# EAGLE board untitled (EAGLE 9.6.2)
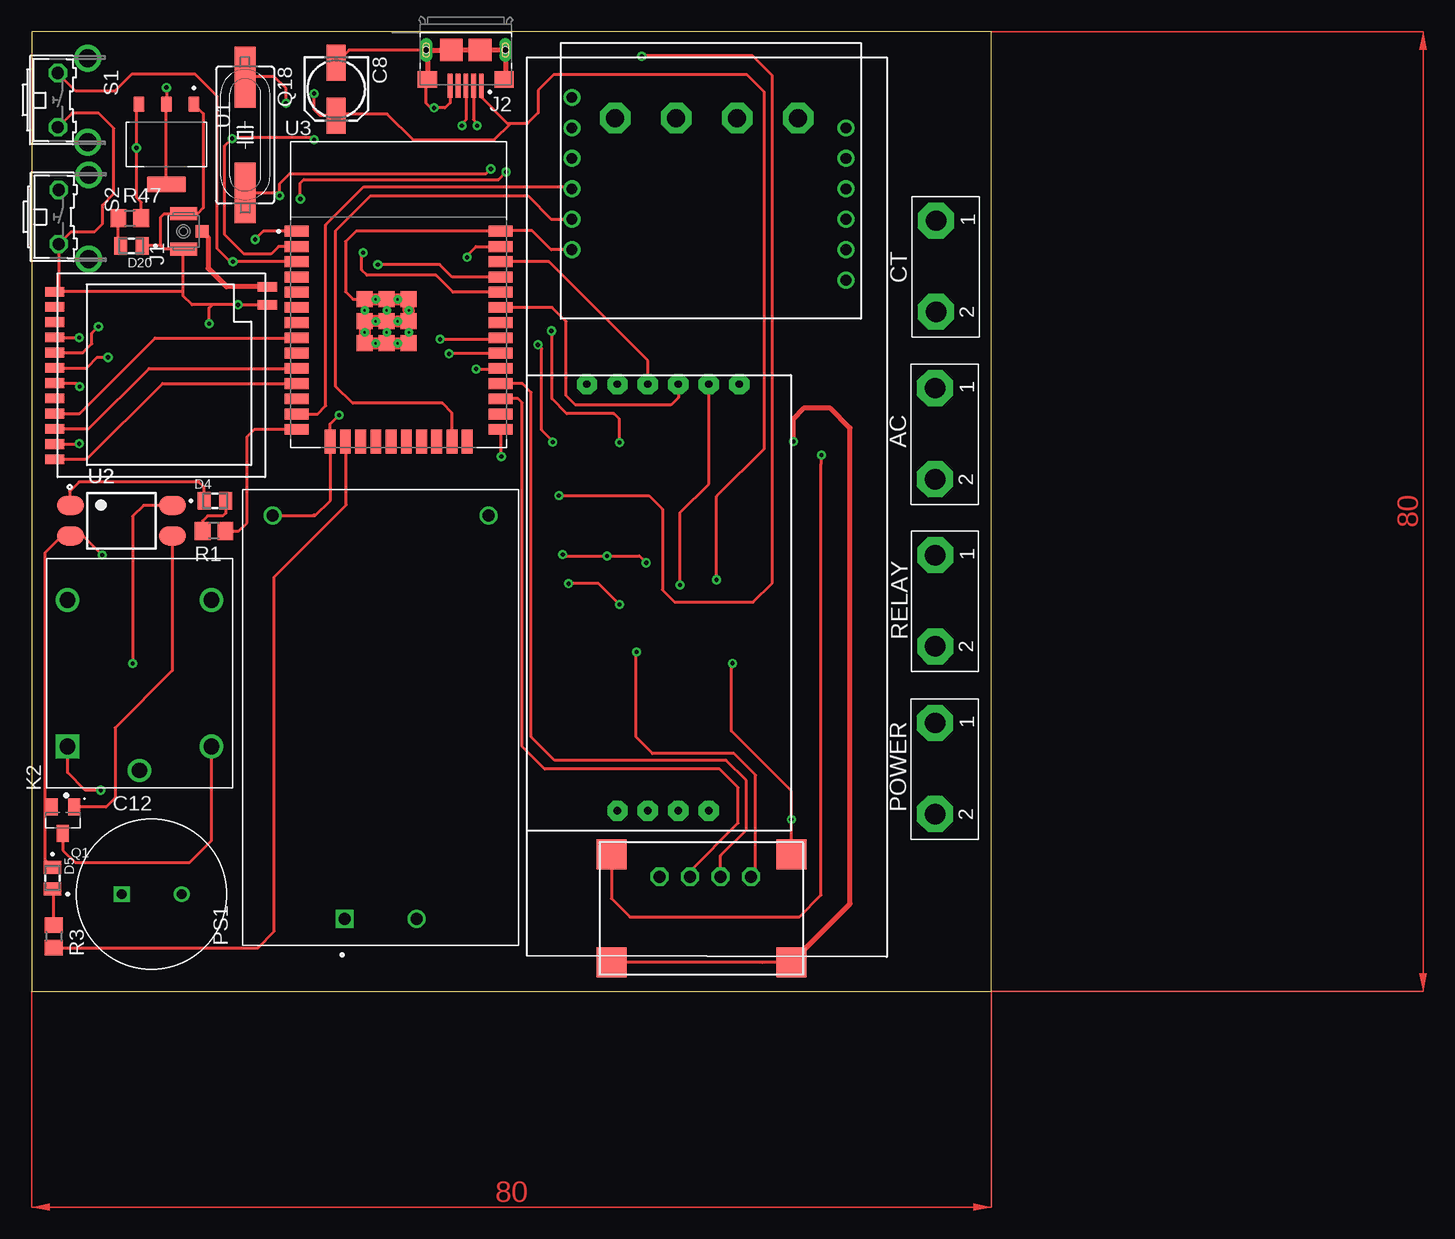
[diagram p0: board, top side]
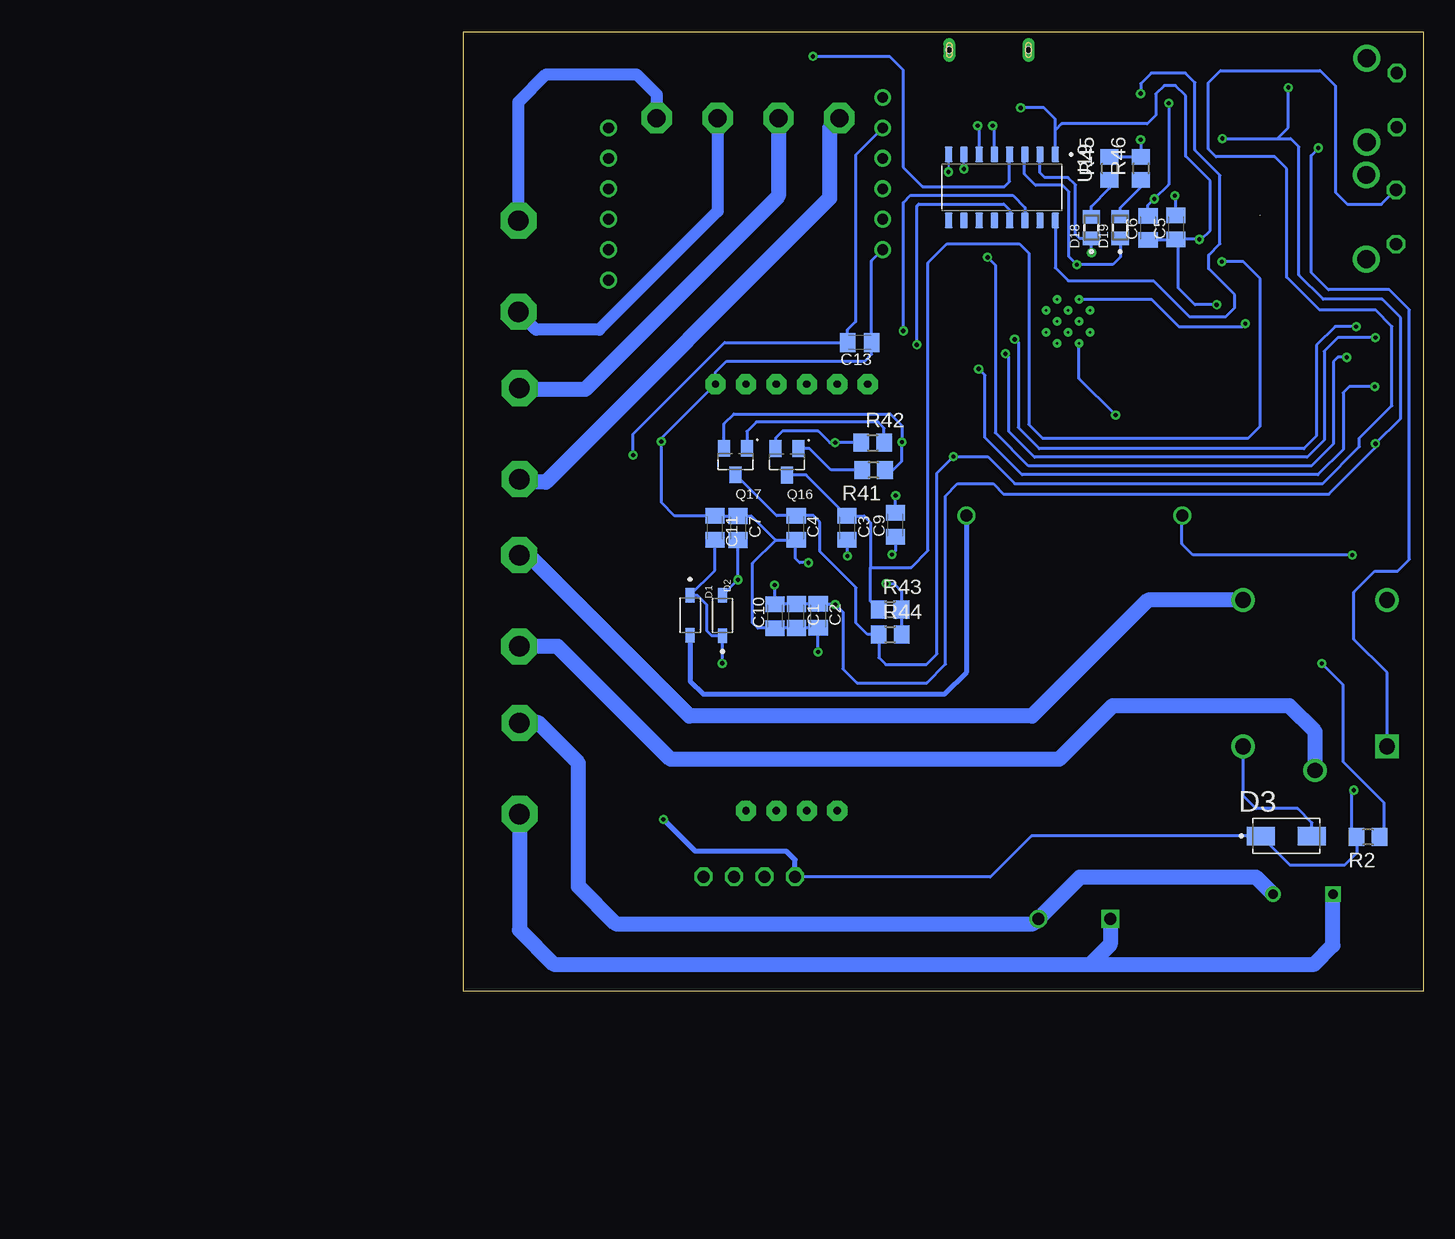
[diagram p1: board, bottom side, seen from below]

Size 80 x 80 mm. Coordinates in mm from the lower left corner, seen from the top.
Outline: 0,80 0,0 80,0 80,80 0,80
Copper layers (1*16): Top 0.035mm / dielectric 1.5mm / Bottom 0.035mm
Design rules "default": minimum track width 6mil, minimum drill 0.35mm, track to track 6mil, track to pad 6mil, pad to pad 6mil, via to via 6mil, smd to smd 6mil, copper to edge 40mil, drill to drill 6mil, minimum pad ring 10mil, minimum via ring 8mil, stop-mask expansion 4mil, vias tented up to drill 0mil, thermal gap 10mil

## Footprints (pad centres in the part's own frame; a part is rotated, then mirrored left to right if it is on the bottom)
C0805K = smd 1.3 x 1.6: 1 -1,0; 2 1,0
153CLV-0505 = smd 3 x 1.6: + 2.2,0; - -2.2,0
CAPPRD500W60D1250H2200 = drill 0.8 pad 1.15: N 2.5,0 | drill 0.8 pad 1.15 square: P -2.5,0
SOD3715X145N = smd 1.21 x 0.73: A 1.68,0; C -1.68,0
DIOM5226X240N = smd 2.33 x 1.55: A 2.135,0; C -2.135,0
LEDC2012X120N = smd 1.1 x 1.45: A 0.9,0; C -0.9,0
HRS_U.FL-R-SMT(01) = smd 1.1 x 2.25: 1 -1.475,0; 2 1.475,0 | smd 1.05 x 1.1: 3 0,-1.55
FCI_10118193-0001LF = smd 0.4 x 2: 1 -1.3,2.975; 2 -0.65,2.975; 3 0,2.975; 4 0.65,2.975; 5 1.3,2.975 | smd 1.6 x 1.4: S1 -3.2,2.45; S2 3.2,2.45 | smd 1.9 x 1.9: S3 1.2,0; S4 -1.2,0 | drill 0.5 pad 0.9 long: S5 -3.3,0; S6 3.3,0 | hole 0.5: -3.3,0; 3.3,0
RELAY_SRD-05VDC-SL-C = drill 1.32 square: A1 -6.1,6 | drill 1.32: A2 -6.1,-6; NC 6.1,6; NO 6.1,-6 | drill 1.29: COM -8.1,0
LORA-NICERF-V2 = smd 1.6 x 0.8: ANT 9.17,6.81; DIO0 -8.57,-5.03; DIO1 -8.57,-3.76; DIO2 -8.57,-2.49; GND -8.57,6.4; GND1 9.17,5.31; MISO -8.57,1.32; MOSI -8.57,0.05; NC -8.57,5.13; NC1 -8.57,3.86; NRST -8.57,-7.57; NSS -8.57,-1.22; SCK -8.57,2.59; VCC -8.57,-6.3
MINI360 = smd 2.5 x 2.5: IN+ 1,1; IN- 1,10; OUT+ 16,1; OUT- 16,10
CONV_HLK-5M05 = drill 1 pad 1.5 square: 1 -16.8,3 | drill 1 pad 1.5: 2 -16.8,-3; 3 16.8,9; 4 16.8,-9
PZEM004T = drill 1 octagon: 5V 3.7,-10.06; GND 3.7,-17.68; RX 3.7,-12.6; TX 3.7,-15.14 | drill 1.5 pad 2.54 octagon: CT1+ 66.94,-6.36; CT1- 66.94,-11.44; L1 66.94,-16.52; N1 66.94,-21.6
SOT95P240X120-3N = smd 1 x 1.4: 1 -0.95,-1.1; 2 0.95,-1.1; 3 0,1.1
SM49 = smd 5.08 x 1.778: 1 -4.826,0; 2 4.826,0
R0805 = smd 1.3 x 1.5: 1 -0.95,0; 2 0.95,0
RTC3231 = drill 0.6 pad 1.676 octagon: 32K -15.24,0; GND -15.24,12.7; GND1 20.32,10.16; SCL -15.24,5.08; SCL1 20.32,2.54; SDA -15.24,7.62; SDA1 20.32,5.08; SQW -15.24,2.54; VCC -15.24,10.16; VCC1 20.32,7.62
B3F-31XX = drill 1.016 octagon: 1 -2.261,-1.245; 2 2.261,-1.245 | drill 1.499 pad 2.159: 3 -3.505,1.245; 4 3.505,1.245
SIM800L = drill 0.9: DTR 17.78,-7.62; GND -5.08,-15.24; MIC+ 17.78,-10.16; MIC- 17.78,-12.7; NET -5.08,-2.54; RING 17.78,-5.08; RST -5.08,-7.62; RXD -5.08,-10.16; SPK+ 17.78,-15.24; SPK- 17.78,-17.78; TXD -5.08,-12.7; VCC -5.08,-5.08
TB7.62 = drill 1.7 pad 3 octagon: T1 -3.7,-0.6; T2 3.9,-0.6
SOT229P700X180-4N = smd 1.31 x 0.93: 1 -3.345,2.29; 2 -3.345,0; 3 -3.345,-2.29 | smd 1.31 x 3.24: 4 3.345,0
SOT254P975X400-4N = smd 2.25 x 1.6: 1 -4.25,1.27; 2 -4.25,-1.27; 3 4.25,-1.27; 4 4.25,1.27
MODULE_ESP32-WROOM-32D = smd 2 x 0.9: 1 -8.5,5.26; 2 -8.5,3.99; 3 -8.5,2.72; 4 -8.5,1.45; 5 -8.5,0.18; 6 -8.5,-1.09; 7 -8.5,-2.36; 8 -8.5,-3.63; 9 -8.5,-4.9; 10 -8.5,-6.17; 11 -8.5,-7.44; 12 -8.5,-8.71; 13 -8.5,-9.98; 14 -8.5,-11.25; 25 8.5,-11.25; 26 8.5,-9.98; 27 8.5,-8.71; 28 8.5,-7.44; 29 8.5,-6.17; 30 8.5,-4.9; 31 8.5,-3.63; 32 8.5,-2.36; 33 8.5,-1.09; 34 8.5,0.18; 35 8.5,1.45; 36 8.5,2.72; 37 8.5,3.99; 38 8.5,5.26 | smd 0.9 x 2: 15 -5.715,-12.25; 16 -4.445,-12.25; 17 -3.175,-12.25; 18 -1.905,-12.25; 19 -0.635,-12.25; 20 0.635,-12.25; 21 1.905,-12.25; 22 3.175,-12.25; 23 4.445,-12.25; 24 5.715,-12.25 | smd 1.33 x 1.33: 39_1 -2.835,-0.405; 39_2 -1,-0.405; 39_3 0.835,-0.405; 39_4 -2.835,-2.24; 39_5 -1,-2.24; 39_6 0.835,-2.24; 39_7 -2.835,-4.075; 39_8 -1,-4.075; 39_9 0.835,-4.075 | drill 0.2 pad 0.3: 39_10 -1.917,-0.405; 39_11 -0.083,-0.405; 39_12 -2.835,-1.323; 39_13 -1,-1.323; 39_14 0.835,-1.323; 39_15 -1.917,-2.24; 39_16 -0.083,-2.24; 39_17 -2.835,-3.158; 39_18 -1,-3.158; 39_19 0.835,-3.158; 39_20 -1.917,-4.075; 39_21 -0.083,-4.075
SOIC127P600X180-16N = smd 1.31 x 0.62: 1 -2.75,4.445; 2 -2.75,3.175; 3 -2.75,1.905; 4 -2.75,0.635; 5 -2.75,-0.635; 6 -2.75,-1.905; 7 -2.75,-3.175; 8 -2.75,-4.445; 9 2.75,-4.445; 10 2.75,-3.175; 11 2.75,-1.905; 12 2.75,-0.635; 13 2.75,0.635; 14 2.75,1.905; 15 2.75,3.175; 16 2.75,4.445

## Placement (x,y rotation side)
C1  10uF  [C0805K]  52.24,31.28 270 bottom
C2  100nF  [C0805K]  50.42,31.29 270 bottom
C3  100nF  [C0805K]  48.02,38.62 270 bottom
C4  100nF  [C0805K]  52.26,38.63 270 bottom
C5  22pF  [C0805K]  20.6,63.66 90 bottom
C6  22pF  [C0805K]  22.92,63.63 90 bottom
C7  1uF  [C0805K]  57.1,38.61 270 bottom
C8  10uF  [153CLV-0505]  25.4,75.2 270 top
C9  100nF  [C0805K]  43.99,38.87 90 bottom
C10  10uF  [C0805K]  54.03,31.26 90 bottom
C11  10uF  [C0805K]  59.03,38.63 270 bottom
C12  UPM2E100MHD1TO  [CAPPRD500W60D1250H2200]  10.01,8.1 0 top
C13  10uF  [C0805K]  46.96,54.08 180 bottom
D1  1N5819HW-7  [SOD3715X145N]  61.1,31.34 270 bottom
D2  1N5819HW-7  [SOD3715X145N]  58.4,31.32 90 bottom
D3  US1M-13  [DIOM5226X240N]  11.4,12.94 0 bottom
D4  SML-LXT0805IW-TR  [LEDC2012X120N]  15.29,40.88 0 top
D5  SML-LXT0805IW-TR  [LEDC2012X120N]  1.75,9.42 270 top
D18  SML-LXT0805IW-TR  [LEDC2012X120N]  27.65,63.65 90 bottom
D19  SML-LXT0805IW-TR  [LEDC2012X120N]  25.25,63.66 90 bottom
D20  SML-LXT0805IW-TR  [LEDC2012X120N]  8.33,62.13 180 top
J1  U.FL-R-SMT(01)  [HRS_U.FL-R-SMT(01)]  12.68,63.34 90 top
J2  10118193-0001LF  [FCI_10118193-0001LF]  36.2,78.46 180 top
K2  SRD-05VDC-SL-C  [RELAY_SRD-05VDC-SL-C]  9,26.5 90 top
LORA-NICERF-V1  [LORA-NICERF-V2]  10.49,51.91 0 top
MINI1  [MINI360]  64.33,12.39 180 top
PS1  HLK-5M05  [CONV_HLK-5M05]  29.08,22.83 90 top
PZEM004T1  [PZEM004T]  42.29,5.84 90 top
Q1  S9013  [SOT95P240X120-3N]  2.62,14.25 180 top
Q16  MMBT3904  [SOT95P240X120-3N]  53.03,44.13 180 bottom
Q17  MMBT3904  [SOT95P240X120-3N]  57.31,44.15 180 bottom
Q18  12MHz  [SM49]  17.8,71.37 270 top
R1  330  [R0805]  15.21,38.37 180 top
R2  10k  [R0805]  4.59,12.85 180 bottom
R3  10k  [R0805]  1.85,4.57 270 top
R41  10k  [R0805]  45.81,43.45 180 bottom
R42  10k  [R0805]  45.87,45.72 0 bottom
R43  10k  [R0805]  44.43,31.81 0 bottom
R44  10k  [R0805]  44.43,29.74 0 bottom
R45  10k  [R0805]  26.13,68.58 90 bottom
R46  10k  [R0805]  23.51,68.59 90 bottom
R47  10k  [R0805]  8.19,64.44 0 top
RTC1  [RTC3231]  46.29,35.36 270 top
S1  [B3F-31XX]  3.44,74.28 270 top
S2  [B3F-31XX]  3.51,64.54 270 top
SIM800L1  [SIM800L]  50.12,77.05 0 top
TB7.1  [TB7.62]  75.92,18.66 270 top
TB7.2  [TB7.62]  75.94,32.65 270 top
TB7.3  [TB7.62]  75.93,46.58 270 top
TB7.4  [TB7.62]  76.01,60.53 270 top
U1  AMS1117  [SOT229P700X180-4N]  11.24,70.6 270 top
U2  PC817X2NIP0F  [SOT254P975X400-4N]  7.49,39.22 0 top
U3  ESP32-WROOM-32D  [MODULE_ESP32-WROOM-32D]  30.6,58.09 0 top
U19  CH340G  [SOIC127P600X180-16N]  35.1,67.01 270 bottom

## Library data of the parts
C1-C11 C13 = rcl; SPICEPREFIX: C
C12 = UPM2E100MHD1TO; AVAILABILITY: In Stock; DESCRIPTION: 10 µF 250 V Aluminum Electrolytic Capacitors Radial, Can - 5000 Hrs @ 105°C; MF: Nichicon; MP: UPM2E100MHD1TO; PACKAGE: Radial Nichicon; PRICE: None; PURCHASE-URL: https://pricing.snapeda.com/search/part/UPM2E100MHD1TO/?ref=eda
D1 D2 = 1N5819HW-7; AVAILABILITY: In Stock; DESCRIPTION: Diode Schottky 40 V 1A Surface Mount SOD-123; MF: Diodes Inc.; MP: 1N5819HW-7; PACKAGE: SOD-123 Fairchild Semiconductor; PRICE: None; PURCHASE-URL: https://pricing.snapeda.com/search/part/1N5819HW-7/?ref=eda
D3 = US1M-13; AVAILABILITY: In Stock; DESCRIPTION: Diode Standard 1000 V 1A Surface Mount SMA; MF: Diodes Incorporated; MP: US1M-13; PACKAGE: DO-214AC-214 Diodes Incorporated; PRICE: None; PURCHASE-URL: https://pricing.snapeda.com/search/part/US1M-13/?ref=eda
D4 D5 D18-D20 = SML-LXT0805IW-TR; AVAILABILITY: In Stock; DESCRIPTION: Red - LED Indication - Discrete 2V 0805 (2012 Metric); MF: Lumex Opto/Components; MP: SML-LXT0805IW-TR; PACKAGE: 0805 Lumex; PRICE: None; PURCHASE-URL: https://pricing.snapeda.com/search/part/SML-LXT0805IW-TR/?ref=eda
J1 = U.FL-R-SMT_01_; AVAILABILITY: In Stock; DESCRIPTION: U.FL (UMCC) Connector Receptacle, Male Pin 50Ohm Surface Mount Solder. RF Connectors / Coaxial Connectors; MF: Hirose; MP: U.FL-R-SMT(01); PACKAGE: None; PRICE: None; PURCHASE-URL: https://pricing.snapeda.com/search/part/U.FL-R-SMT(01)/?ref=eda
J2 = 10118193-0001LF; AVAILABILITY: In Stock; DESCRIPTION: USB - micro B USB 2.0 Receptacle Connector 5 Position Surface Mount, Right Angle; Through Hole; MF: FCI; MP: 10118193-0001LF; PACKAGE: None; PRICE: None; PURCHASE-URL: https://pricing.snapeda.com/search/part/10118193-0001LF/?ref=eda
K2 = SRD-05VDC-SL-C; AVAILABILITY: Not in stock; DESCRIPTION: 5V Trigger Relay Module For Arduino And Raspberry Pi 5V Trigger Relay Module For Arduino And Raspberry Pi; MF: Songle Relay; MP: SRD-05VDC-SL-C; PACKAGE: NON STANDARD-5 Songle Relay; PRICE: None
LORA-NICERF-V1 = LORA-NICERF-V2
MINI1 = mini360
PS1 = HLK-5M05; AVAILABILITY: Not in stock; MF: Hi-link; MP: HLK-5M05; PACKAGE: Package; PRICE: None
PZEM004T1 = PZEM004T
Q1 = S9013; AVAILABILITY: In Stock; DESCRIPTION: Bipolar (BJT) Transistor NPN 20V 500mA 625mW Through Hole TO-92-3; MF: JCET; MP: S9013; PACKAGE: SOT-23-3 JCET; PRICE: None; PURCHASE-URL: https://pricing.snapeda.com/search/part/S9013/?ref=eda
Q16 Q17 = MMBT3904; AVAILABILITY: In Stock; DESCRIPTION: Bipolar (BJT) Transistor NPN 40 V 200 mA 300MHz 300 mW Surface Mount SOT-23-3 (TO-236); MF: ON Semiconductor; MP: MMBT3904; PACKAGE: SOT-23-3 Motorola; PRICE: None
Q18 = crystal; OC_FARNELL: unknown; OC_NEWARK: unknown
R1-R3 R41-R47 = rcl; SPICEPREFIX: R
RTC1 = rtc3231
S1 S2 = switch-omron; MPN: B3F-3100; OC_FARNELL: 959704; OC_NEWARK: 36M3582
SIM800L1 = sim800l
TB7.1-TB7.4 = TB7.62
U1 = AMS1117; AVAILABILITY: Not in stock; DESCRIPTION: 1A LOW DROPOUT VOLTAGE REGULATOR SOT-223; MF: Advanced Monolithic Systems; MP: AMS1117; PACKAGE: SOT-223 Seeed Technology; PRICE: None
U2 = PC817X2NIP0F; AVAILABILITY: Not in stock; DESCRIPTION: Optoisolator Transistor Output 5000Vrms 1 Channel 4-SMD; MF: Sharp Microelectronics; MP: PC817X2NIP0F; PACKAGE: SMD-4 Sharp Microelectronics; PRICE: None
U3 = ESP32-WROOM-32D; AVAILABILITY: In Stock; DESCRIPTION: Bluetooth, WiFi 802.11b/g/n, Bluetooth v4.2 +EDR, Class 1, 2 and 3 Transceiver Module 2.4GHz ~ 2.5GHz Integrated; MF: Espressif Systems; MP: ESP32-WROOM-32D; PACKAGE: Module Espressif Systems; PRICE: None; PURCHASE-URL: https://pricing.snapeda.com/search/part/ESP32-WROOM-32D/?ref=eda
U19 = CH340G; AVAILABILITY: Not in stock; DESCRIPTION: USB Interface Integrated Circuit; MF: WCH; MP: Ch340G; PACKAGE: None; PRICE: None

## Nets
3V3: C1.1 C2.1 C10.2 LORA-NICERF-V1.VCC R43.2 R44.2 R45.2 R46.2 RTC1.VCC U1.2 U1.4 U3.2
ANT: J1.3 LORA-NICERF-V1.ANT
DTR: Q17.2 R41.1 U19.13
EN: C3.1 Q16.3 R43.1 S1.1 U3.3
GND: C1.2 C2.2 C3.2 C4.2 C5.1 C6.1 C7.1 C8.- C9.1 C10.1 C11.1 C13.1 D5.C D20.C J1.1 J1.2 J2.5 J2.S1 J2.S2 J2.S3 J2.S4 J2.S5 J2.S6 LORA-NICERF-V1.GND LORA-NICERF-V1.GND1 MINI1.IN- MINI1.OUT- PS1.3 PZEM004T1.GND Q1.2 RTC1.GND S1.2 S2.2 SIM800L1.GND U1.1 U2.2 U3.1 U3.15 U3.38 U3.39_1 U3.39_2 U3.39_3 U3.39_4 U3.39_5 U3.39_6 U3.39_7 U3.39_8 U3.39_9 U3.39_10 U3.39_11 U3.39_12 U3.39_13 U3.39_14 U3.39_15 U3.39_16 U3.39_17 U3.39_18 U3.39_19 U3.39_20 U3.39_21 U19.1
IO0: C4.1 Q17.3 R44.1 S2.1 U3.25
LED-LORA: R3.2 U3.16
LORA_DI0: LORA-NICERF-V1.DIO0 U3.10
LORA_DI1: LORA-NICERF-V1.DIO1 U3.8
MISO_VSPI: LORA-NICERF-V1.MISO U3.31
MOSI_VSPI: LORA-NICERF-V1.MOSI U3.37
N$1: C12.P PS1.1 TB7.1.T2
N$2: C12.N PS1.2 TB7.1.T1
N$3: D1.A PS1.4
N$4: D4.C U2.1
N$5: R2.1 U2.4
N$6: Q1.1 U2.3
N$7: D3.A K2.A2 Q1.3
N$8: D4.A R1.2
N$9: K2.COM TB7.2.T2
N$10: K2.NO TB7.2.T1
N$11: Q17.1 R42.2
N$12: D5.A R3.1
N$13: C13.2 MINI1.OUT+ SIM800L1.VCC
N$15: PZEM004T1.CT1+ TB7.3.T2
N$16: PZEM004T1.CT1- TB7.3.T1
N$17: PZEM004T1.L1 TB7.4.T2
N$18: PZEM004T1.N1 TB7.4.T1
N$99: Q16.1 R41.2
N$102: C5.2 Q18.2 U19.7
N$103: C6.2 Q18.1 U19.8
N$104: C9.2 U19.4
N$105: D18.A R45.1
N$106: D19.A R46.1
N$107: D20.A R47.1
RELAY: R1.1 U3.14
RST_LORA: LORA-NICERF-V1.NRST U3.11
RTS: Q16.2 R42.1 U19.14
RX: D19.C U3.35 U19.3
RX_PZEM: PZEM004T1.RX U3.27
RX_SIM: SIM800L1.RXD U3.13
SCK_VSPI: LORA-NICERF-V1.SCK U3.30
SCL: RTC1.SCL U3.36
SDA: RTC1.SDA U3.33
SS_LORA: LORA-NICERF-V1.NSS U3.29
TX: D18.C U3.34 U19.2
TX_PZEM: PZEM004T1.TX U3.28
TX_SIM: SIM800L1.TXD U3.23
USB_N: J2.2 U19.6
USB_P: J2.3 U19.5
VCC: C11.2 D1.C D2.C D3.C K2.A1 MINI1.IN+ PZEM004T1.5V R2.2 R47.2 U1.3
VCC_USB: C7.2 C8.+ D2.A J2.1 U19.16

## Tracks (layer width: path | path; a pad name or v marks a point on that pad's centre or on a via)
3V3  (via drill 0.35)
  Top 0.254: U1.4 U1.2 v11.25,75.33 | U3.2 20.6,62.08 19.97,61.45 17.71,61.45 16.11,63.05 16.11,70.47 v16.73,71.08 16.83,71.18 23.34,71.18 v23.55,70.97 | v54.05,33.86 54.05,39.89 56.45,42.29 RTC1.VCC | v49.01,32.24 47.28,33.97 v44.75,33.97 | LORA-NICERF-V1.VCC 3.95,45.61 v3.97,45.63
  Bottom 0.254: R45.2 26.12,69.54 R46.2 23.55,69.58 v23.55,70.97 | R44.2 R43.2 43.48,33.33 44.12,33.97 v44.75,33.97 | v16.73,71.08 12.15,71.08 | v11.25,75.33 11.25,71.99 12.15,71.08 | v54.05,33.86 54.03,33.83 C10.2 54.01,32.28 C1.1 C2.1 49.05,32.29 v49.01,32.24 48.37,31.61 48.37,26.88 47.19,25.7 41.38,25.7 39.81,27.27 39.81,41.3 38.8,42.3 35.83,42.3 34.96,41.44 7.85,41.44 3.9,45.38 3.9,45.56 v3.97,45.63 1.87,47.73 1.87,56.13 3.42,57.68 8.32,57.68 10.34,59.69 10.34,70.38 11.04,71.08 12.15,71.08
ANT
  Top 0.406: J1.3 14.71,62.85 14.71,60.26 16.25,58.72 LORA-NICERF-V1.ANT
DTR  (via drill 0.35)
  Top 0.254: v43.45,45.79 43.45,45.87 42.53,46.78 42.53,53.56 v42.21,53.88
  Bottom 0.254: Q17.2 58.26,47.32 57.46,48.12 44.42,48.12 43.45,47.15 v43.45,45.79 43.45,44.19 44.18,43.45 R41.1 | v42.21,53.88 42.21,65.45 42.05,65.61 34.94,65.61 34.45,65.12 34.45,64.27 U19.13
EN  (via drill 0.35)
  Top 0.254: U3.3 v16.79,60.81 16.57,60.81 15.49,61.89 15.49,74.61 13.64,76.46 8.37,76.46 6.95,75.04 3.69,75.04 S1.1
  Bottom 0.254: Q16.3 51.43,43.03 C3.1 46.61,39.62 46.06,39.07 46.06,35.34 | 46.06,35.34 46.06,32.49 R43.1 | 46.06,35.34 42.66,35.34 41.26,36.74 41.26,60.73 39.67,62.32 33.66,62.32 32.87,61.53 32.87,47.25 31.74,46.11 14.56,46.11 13.57,47.1 13.57,59.4 14.99,60.82 16.79,60.82 v16.79,60.81
GND  (via drill 0.35)
  Top 0.254: J2.5 34.9,74.06 34.47,73.64 v33.55,73.64 33.28,73.64 32.88,74.04 32.88,75.89 J2.S2 | 60.92,2.39 MINI1.IN- MINI1.OUT- | J1.1 12.64,61.86 | 12.64,61.86 11.02,61.86 10.75,62.13 | 10.75,62.13 D20.C | 10.75,62.13 10.75,64.51 11.05,64.81 J1.2 13.83,64.81 14.32,65.3 14.32,73.16 U1.1 | J2.S6 26.45,78.46 C8.- | PS1.3 23.49,39.63 | 23.49,39.63 23.63,39.63 24.91,40.92 24.91,45.81 U3.15 24.89,47.28 v25.63,48.02 | SIM800L1.GND 43.31,61.81 41.71,63.42 39.17,63.42 U3.38 27.04,63.35 26.18,62.49 26.18,58.3 26.8,57.68 U3.39_1 | LORA-NICERF-V1.GND1 v17.21,57.22 15.08,57.22 | 15.08,57.22 13.37,57.22 12.64,57.96 12.64,58.31 | 12.64,58.31 12.64,61.86 | PZEM004T1.GND 60.36,9.93 60.36,18.02 58.56,19.82 51.77,19.82 50.4,21.18 50.4,28.26 v50.43,28.28 | v44.28,36.4 44.4,36.28 v47.98,36.28 50.68,36.28 v51.24,35.72 | 23.56,39.7 23.49,39.63 | Q1.2 1.14,15.88 | 1.14,15.88 1.14,36.58 2.52,37.95 U2.2 4.32,37.95 v5.9,36.37 | D5.C 1.14,10.93 1.14,15.88 | 12.64,58.31 2.11,58.31 | 2.11,58.31 LORA-NICERF-V1.GND | 2.11,58.31 2.26,58.47 S2.2 3.3,63.31 5.25,63.31 5.91,63.98 5.91,65.53 6.85,66.47 6.85,71.93 5.58,73.2 3.38,73.2 S1.2 | v14.81,55.66 14.81,56.95 15.08,57.22 | U3.1 19.32,63.35 v18.64,62.67
  Top 0.406: J2.S1 39.5,76.11 J2.S5 J2.S4 J2.S3 J2.S6 33,78.36 J2.S2 | 31.44,56.71 U3.39_6 U3.39_14 | U3.39_5 U3.39_13 U3.39_2 U3.39_10 | U3.39_5 U3.39_16 | U3.39_16 U3.39_5 | U3.39_19 U3.39_9 U3.39_21 | U3.39_18 U3.39_8 U3.39_20 | U3.39_17 U3.39_4 U3.39_15 | U3.39_12 U3.39_1 | U3.39_11 U3.39_3 | MINI1.IN- 68.23,7.29 68.23,46.95 66.59,48.59 64.37,48.59 63.48,47.7 63.48,45.83 v63.5,45.83
  Top 1.016: U3.39_1 U3.39_2 U3.39_3 31.44,56.71 | U3.39_16 U3.39_6 | U3.39_5 U3.39_4 U3.39_7 U3.39_8 U3.39_9
  Bottom 0.254: SIM800L1.GND 45.97,60.89 C13.1 45.97,53.1 46.54,52.52 58.06,52.52 58.99,51.59 RTC1.GND 63.5,46.09 v63.5,45.83 63.5,40.75 62.38,39.63 C11.1 59.02,39.61 C7.1 55.99,39.61 53.99,37.61 53.96,37.61 | 53.96,37.61 52.29,37.61 C4.2 52.33,37.56 52.33,36.08 51.97,35.72 v51.24,35.72 | 48.03,37.63 C3.2 47.98,37.58 v47.98,36.28 | 44.24,37.62 C9.1 43.99,36.69 v44.28,36.4 | C2.2 50.68,30.29 | 50.68,30.29 C1.2 54.01,30.28 C10.1 55.45,30.27 55.9,30.71 55.9,35.67 53.96,37.61 | 20.72,62.63 20.63,62.63 C5.1 20.44,62.66 20.44,58.64 19.02,57.22 v17.21,57.22 | 20.72,62.63 C6.1 | v50.43,28.28 50.43,30.03 50.68,30.29 | v5.9,36.37 19.18,36.37 20.09,37.28 20.09,39.62 PS1.3 | v25.63,48.02 28.68,51.08 U3.39_20 | U19.1 30.66,71.8 | 30.66,71.8 30.66,72.69 31.63,73.67 33.55,73.67 v33.55,73.64 | U3.39_10 22.64,57.68 20.37,55.41 15.06,55.41 v14.81,55.66 | 20.72,62.63 20.68,62.67 v18.64,62.67 18.48,62.67 17.75,63.41 17.75,67.56 19.78,69.59 19.78,74.64 20.64,75.5 21.59,75.5 22.28,74.81 22.28,73.02 23,72.3 30.15,72.3 30.66,71.8
IO0  (via drill 0.35)
  Top 0.254: v39.16,44.57 39.16,46.78 U3.25
  Bottom 0.254: Q17.3 53.9,39.63 C4.1 50.82,39.63 50.29,39.11 50.29,36.67 47.26,33.63 47.26,30.68 46.31,29.74 R44.1 45.38,27.81 44.8,27.23 41.41,27.23 40.52,28.12 40.52,43.21 v39.16,44.57 36.28,44.57 34.03,42.32 8.38,42.32 5.3,45.39 5.3,46.11 2.6,48.81 2.6,55.42 3.96,56.78 8.61,56.78 11.36,59.52 11.36,68.55 12.38,69.56 17.26,69.56 17.9,70.2 17.9,75.75 16.9,76.75 8.59,76.75 7.31,75.48 7.31,66.59 6.31,65.59 3.47,65.59 S2.1
LED-LORA
  Top 0.254: R3.2 18.87,3.62 20.24,4.99 20.24,34.54 26.24,40.54 26.24,45.75 U3.16
LORA_DI0
  Top 0.254: LORA-NICERF-V1.DIO0 4.76,46.88 9.8,51.92 U3.10
LORA_DI1
  Top 0.254: LORA-NICERF-V1.DIO1 4,48.15 10.31,54.46 U3.8
MISO_VSPI  (via drill 0.35)
  Top 0.254: LORA-NICERF-V1.MISO 4.27,53.23 5.02,53.98 5.02,54.84 v5.58,55.4 | v34.05,54.35 38.99,54.35 U3.31
  Bottom 0.254: v5.58,55.4 7.34,55.4 8.88,53.86 8.88,46.3 9.94,45.23 31.99,45.23 33.74,46.99 33.74,54.09 34,54.35 v34.05,54.35
MOSI_VSPI  (via drill 0.35)
  Top 0.254: LORA-NICERF-V1.MOSI 4.59,51.96 5.46,52.84 v6.37,52.84 | U3.37 37.05,62.08 36.3,61.33 v36.3,61.18
  Bottom 0.254: v6.37,52.84 7.11,52.84 7.47,52.47 7.47,45.62 9.31,43.78 32.89,43.78 35.67,46.57 35.67,60.55 v36.3,61.18
N$1
  Bottom 1.27: PS1.1 26.08,3.89 27.73,2.25 | 27.73,2.25 72.48,2.25 75.33,5.09 TB7.1.T2 | 27.73,2.25 9.07,2.25 7.51,3.8 C12.P
N$2
  Bottom 1.27: C12.N 13.92,9.5 28.62,9.5 PS1.2 32.5,5.62 67.31,5.62 70.41,8.71 70.41,19.02 73.77,22.38 75.3,22.38 TB7.1.T1
N$3
  Bottom 0.406: D1.A 61.1,25.86 60,24.76 39.9,24.76 38.05,26.61 38.05,39.6 PS1.4
N$4
  Top 0.254: D4.C 14.39,42.02 13.95,42.45 3.97,42.45 3.18,41.66 3.18,40.55 U2.1
N$5  (via drill 0.35)
  Top 0.254: U2.4 9.33,40.49 8.43,39.59 v8.43,27.31
  Bottom 0.254: v8.43,27.31 6.68,25.56 6.68,19.14 3.26,15.72 3.26,13.23 R2.1
N$6
  Top 0.254: U2.3 11.73,26.72 6.97,21.95 6.97,16.11 6.2,15.35 Q1.1
N$7
  Top 0.254: Q1.3 2.62,11.74 3.64,10.72 13.16,10.72 15,12.56 K2.A2
  Bottom 0.254: D3.A 9.26,14.03 10.45,15.22 13.93,15.22 15,16.29 K2.A2
N$8
  Top 0.254: D4.A 16.19,39.86 15.95,39.62 14.68,39.62 14.26,39.2 R1.2
N$9
  Bottom 1.27: K2.COM 9,21.63 11.15,23.78 25.89,23.78 30.34,19.33 62.72,19.33 72.15,28.75 TB7.2.T2
N$10
  Bottom 1.27: K2.NO 22.93,32.6 32.6,22.93 61.17,22.93 74.58,36.35 TB7.2.T1
N$11
  Bottom 0.254: R42.2 44.92,46.94 45.43,47.45 55.58,47.45 56.36,46.67 Q17.1
N$12
  Top 0.254: R3.1 1.85,8.43 D5.A
N$13  (via drill 0.35)
  Top 0.254: MINI1.OUT+ 48.33,7.73 49.88,6.19 64,6.19 65.82,8.01 65.82,43.96 65.85,43.98 v65.85,44.7
  Bottom 0.254: SIM800L1.VCC 47.3,69.71 47.3,55.81 47.97,55.14 C13.2 58.22,54.08 65.85,46.46 v65.85,44.7
N$15
  Bottom 1.27: PZEM004T1.CT1+ 49.46,71.97 49.46,66.09 73.12,42.44 75.09,42.44 TB7.3.T2
N$16
  Bottom 1.27: PZEM004T1.CT1- 53.73,66.29 69.86,50.16 75.21,50.16 TB7.3.T1
N$17
  Bottom 1.016: PZEM004T1.L1 58.81,65.02 68.69,55.15 73.92,55.15 TB7.4.T2
N$18
  Bottom 1.016: TB7.4.T1 75.41,74.12 73.1,76.43 65.57,76.43 63.9,74.75 PZEM004T1.N1
N$99
  Bottom 0.254: R41.2 49.35,43.45 51.14,45.23 Q16.1
N$102  (via drill 0.35)
  Top 0.254: Q18.2 20.45,66.55 v20.68,66.31 20.68,67.31 21.54,68.17 37.91,68.17 v38.29,68.54
  Bottom 0.152: v38.29,68.54 38.29,69.75 U19.7
  Bottom 0.254: C5.2 20.6,66.23 v20.68,66.31
N$103  (via drill 0.35)
  Top 0.254: Q18.1 17.84,76.23 20.24,76.23 21.21,75.26 v21.21,74.02 | v22.41,66.05 22.41,67.38 22.69,67.66 38.92,67.66 v39.56,68.3
  Bottom 0.152: v39.56,68.3 39.55,68.31 U19.8
  Bottom 0.254: C6.2 22.92,65.53 v22.41,66.05 21.21,67.25 v21.21,74.02
N$104  (via drill 0.35)
  Top 0.254: v43.96,41.31 51.47,41.31 52.6,40.19 52.6,33.45 53.61,32.43 60.16,32.43 61.76,34.03 61.76,76.32 60.09,77.99 50.93,77.99 v50.87,77.93
  Bottom 0.254: C9.2 43.99,41.28 v43.96,41.31 | v50.87,77.93 44.47,77.93 43.35,76.81 43.35,68.71 41.72,67.07 34.89,67.07 34.47,67.5 U19.4
N$105
  Bottom 0.254: D18.A 27.65,65.42 26.13,66.94 R45.1
N$106
  Bottom 0.254: D19.A 25.25,65.3 23.52,67.04 R46.1
N$107
  Top 0.254: D20.A 7.24,62.31 R47.1
RELAY
  Top 0.254: R1.1 17.29,38.37 17.96,39.04 17.96,46.22 18.59,46.85 22.09,46.85 U3.14
RST_LORA
  Top 0.254: LORA-NICERF-V1.NRST 4.61,44.34 10.93,50.65 U3.11
RTS  (via drill 0.35)
  Top 0.254: v49.01,45.72 49.01,47.7 48.55,48.15 44.62,48.15 43.38,49.39 43.38,55 v43.33,55.05
  Bottom 0.254: R42.1 v49.01,45.72 49.45,45.72 50.41,46.69 53.41,46.69 53.98,46.12 Q16.2 | v43.33,55.05 43.33,65.75 42.73,66.36 34.21,66.36 33.19,65.33 33.19,64.26 U19.14
RX  (via drill 0.35)
  Top 0.254: U3.35 35.06,59.54 34.02,60.57 v28.88,60.57 v28.87,60.58
  Bottom 0.254: D19.C 25.25,61.19 25.87,60.58 v28.87,60.58 29.52,61.23 29.52,66.63 30.08,67.19 32.3,67.19 33.23,68.12 33.23,69.73 U19.3
RX_PZEM
  Top 0.152: 39.11,49.39 U3.27
  Top 0.254: PZEM004T1.RX 54.9,10 58.91,14.02 58.91,16.97 57.36,18.51 42.77,18.51 40.9,20.39 40.9,49.06 40.54,49.41 39.14,49.41 39.11,49.39
RX_SIM
  Top 0.254: U3.13 23.83,48.11 24.53,48.81 24.53,63.89 27.7,67.05 44.88,67.05 SIM800L1.RXD
SCK_VSPI  (via drill 0.35)
  Top 0.254: LORA-NICERF-V1.SCK 3.96,54.5 v3.97,54.49 | U3.30 39.05,53.14 v34.82,53.14
  Bottom 0.254: v3.97,54.49 7.1,54.49 8.24,53.36 8.24,45.93 9.65,44.51 32.38,44.51 34.54,46.67 34.54,52.73 34.57,52.76 34.57,52.88 v34.82,53.14
SCL
  Top 0.254: U3.36 43.13,60.81 51.37,52.56 RTC1.SCL
SDA
  Top 0.254: RTC1.SDA 53.91,49.49 53.3,48.87 45.33,48.87 44.56,49.65 44.56,55.83 43.39,57 U3.33
SS_LORA  (via drill 0.35)
  Top 0.254: LORA-NICERF-V1.NSS 3.73,50.69 v4.02,50.4 | v37.05,51.88 39.06,51.88 U3.29
  Bottom 0.254: v4.02,50.4 6.17,50.4 6.67,49.89 6.67,45.14 8.76,43.05 33.43,43.05 36.52,46.15 36.52,51.35 v37.05,51.88
TX  (via drill 0.35)
  Top 0.254: U3.34 35.14,58.27 33.72,59.69 27.97,59.69 27.53,60.13 27.53,61.45 v27.63,61.56
  Bottom 0.254: U19.2 31.93,68.23 31.53,67.83 29.59,67.83 28.97,67.22 28.97,63.1 28.62,62.75 D18.C 27.65,61.58 v27.63,61.56
TX_PZEM
  Top 0.254: PZEM004T1.TX 57.44,11.31 59.58,13.46 59.58,17.56 57.9,19.25 43.62,19.25 41.66,21.21 41.66,49.91 40.92,50.65 U3.28
TX_SIM
  Top 0.254: U3.23 35.05,48.21 34.25,49.01 26.77,49.01 25.36,50.41 25.36,63.4 28.26,66.3 41.38,66.3 43.3,64.38 45.01,64.38 SIM800L1.TXD
USB_N  (via drill 0.35)
  Top 0.254: v37.13,72.15 37.13,72.37 36.85,72.65 J2.2
  Bottom 0.254: v37.13,72.15 37.01,72.03 U19.6
USB_P  (via drill 0.35)
  Top 0.254: J2.3 36.21,72.63 35.88,72.31 v35.88,72.15
  Bottom 0.254: v35.88,72.15 35.76,72.03 35.76,69.78 U19.5
VCC  (via drill 0.35)
  Top 0.254: R47.2 9.14,65.76 8.75,66.16 v8.75,70.3 8.75,73.74 U1.3 | MINI1.IN+ v63.33,14.32 63.33,16.69 58.33,21.69 58.33,27.3 58.39,27.36 v58.42,27.33 | v5.77,16.75 4.47,16.75 3,18.23 K2.A1
  Bottom 0.254: 2.95,20.35 K2.A1 3,26.55 5.77,29.32 5.77,33.27 4.02,35.02 2.13,35.02 1.14,36.01 1.14,56.82 2.81,58.48 7.9,58.48 9.33,59.92 9.33,69.67 8.7,70.3 v8.75,70.3 | PZEM004T1.5V 52.32,9.51 36.08,9.51 32.65,12.94 D3.C 11.08,10.49 6.57,10.49 5.54,11.51 R2.2 6,13.31 6,16.52 v5.77,16.75 | C11.2 59.03,35.09 D1.C 60.52,33.02 59.73,32.23 59.73,30.05 59.31,29.64 D2.C 58.4,27.36 v58.42,27.33
  Bottom 0.406: PZEM004T1.5V 52.35,10.95 53.07,11.67 60.65,11.67 63.31,14.32 v63.33,14.32
VCC_USB  (via drill 0.35)
  Top 0.254: J2.1 37.5,74.5 39.65,72.35 39.96,72.35 | v57.1,34.3 57.1,41.26 61.09,45.25 61.09,74.96 59.64,76.41 43.53,76.41 42.23,75.11 42.23,73.23 41.35,72.35 | 41.35,72.35 41.34,72.35 | v23.55,74.83 23.55,73.49 24.04,73 C8.+ 25.51,73.11 29.65,73.11 31.8,70.96 38.57,70.96 39.96,72.35 | 39.96,72.35 41.35,72.35
  Bottom 0.254: D2.A v57.1,34.3 C7.2 | U19.16 30.66,60.3 29.57,59.22 22.48,59.22 19.5,56.25 16.44,56.25 15.71,56.98 15.71,58.07 17.87,60.22 17.87,61.37 16.93,62.31 16.93,68.02 19.02,70.11 19.02,75.75 19.81,76.54 22.66,76.54 23.55,75.66 v23.55,74.83
(copper drawn outside any net)
  shapes: Top area x2

## Text on the board
tNames: CT | AC | RELAY | POWER